# Altium PCB anafun.PcbDoc
Units mm, origin at the board's own origin, x right, y up, seen from the top; angles counter-clockwise.
Board outline 71 x 44 mm, 2 copper layers (Top Layer, Bottom Layer); 60 components, 25 nets, 135 pads, 34 vias.
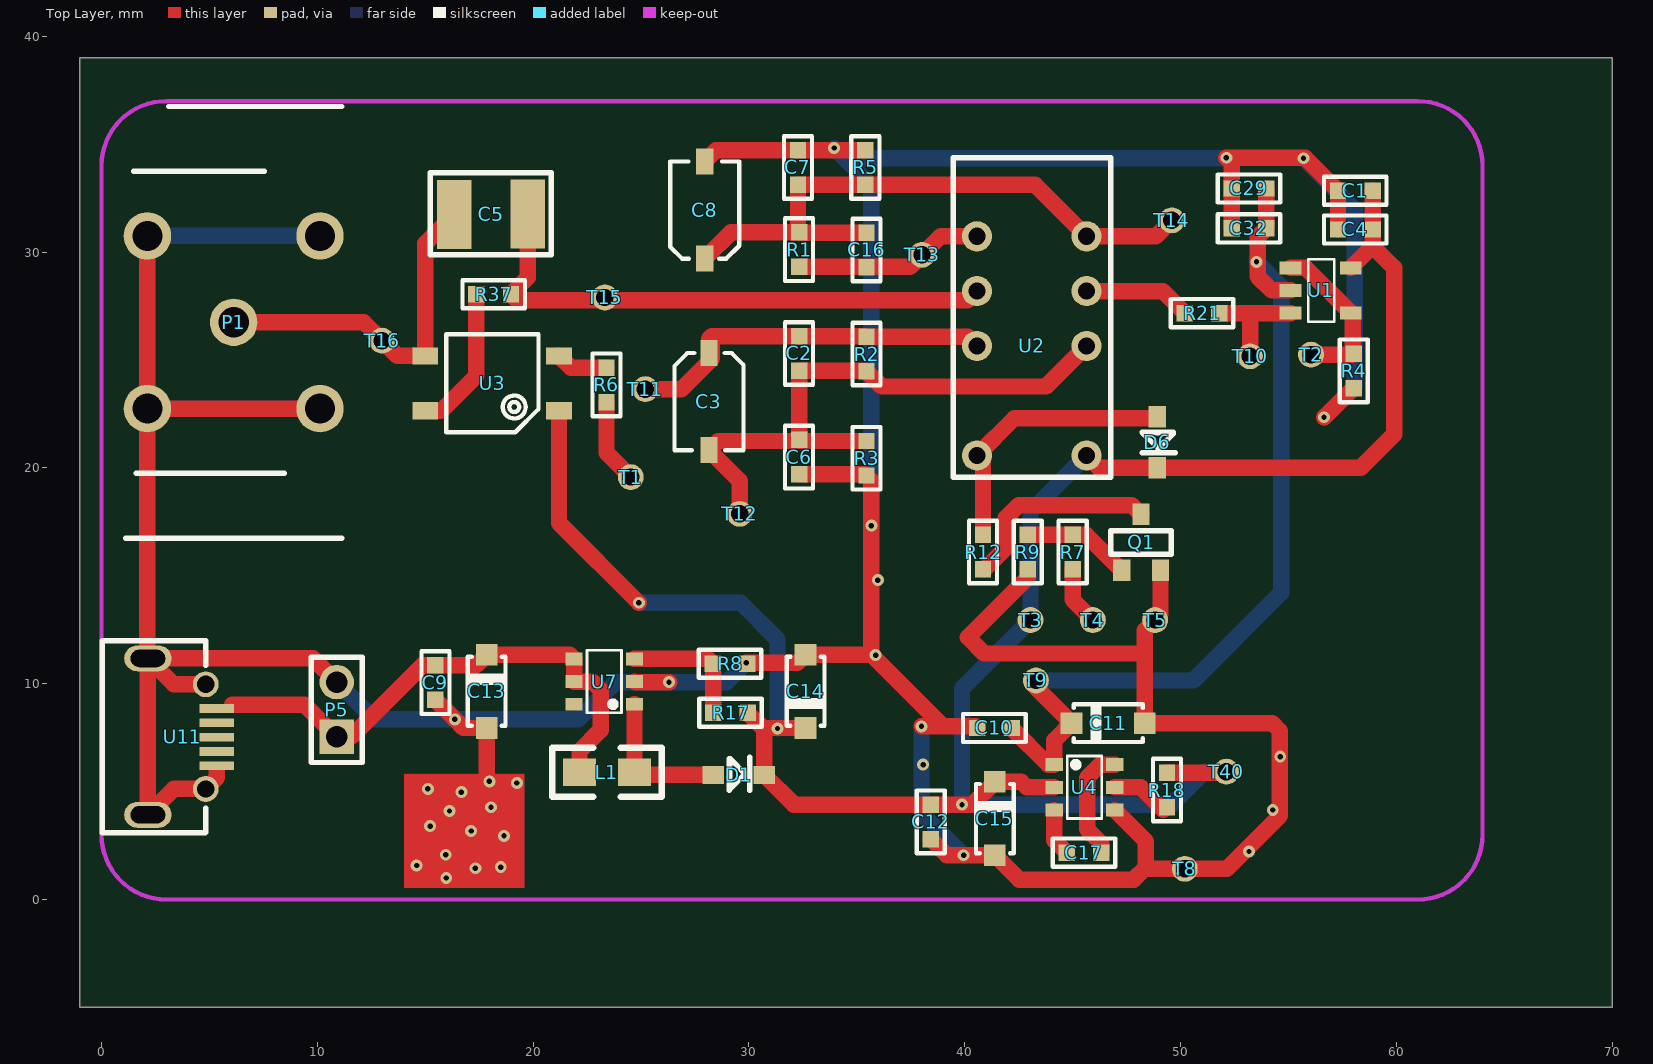
[diagram p0: Top Layer view]
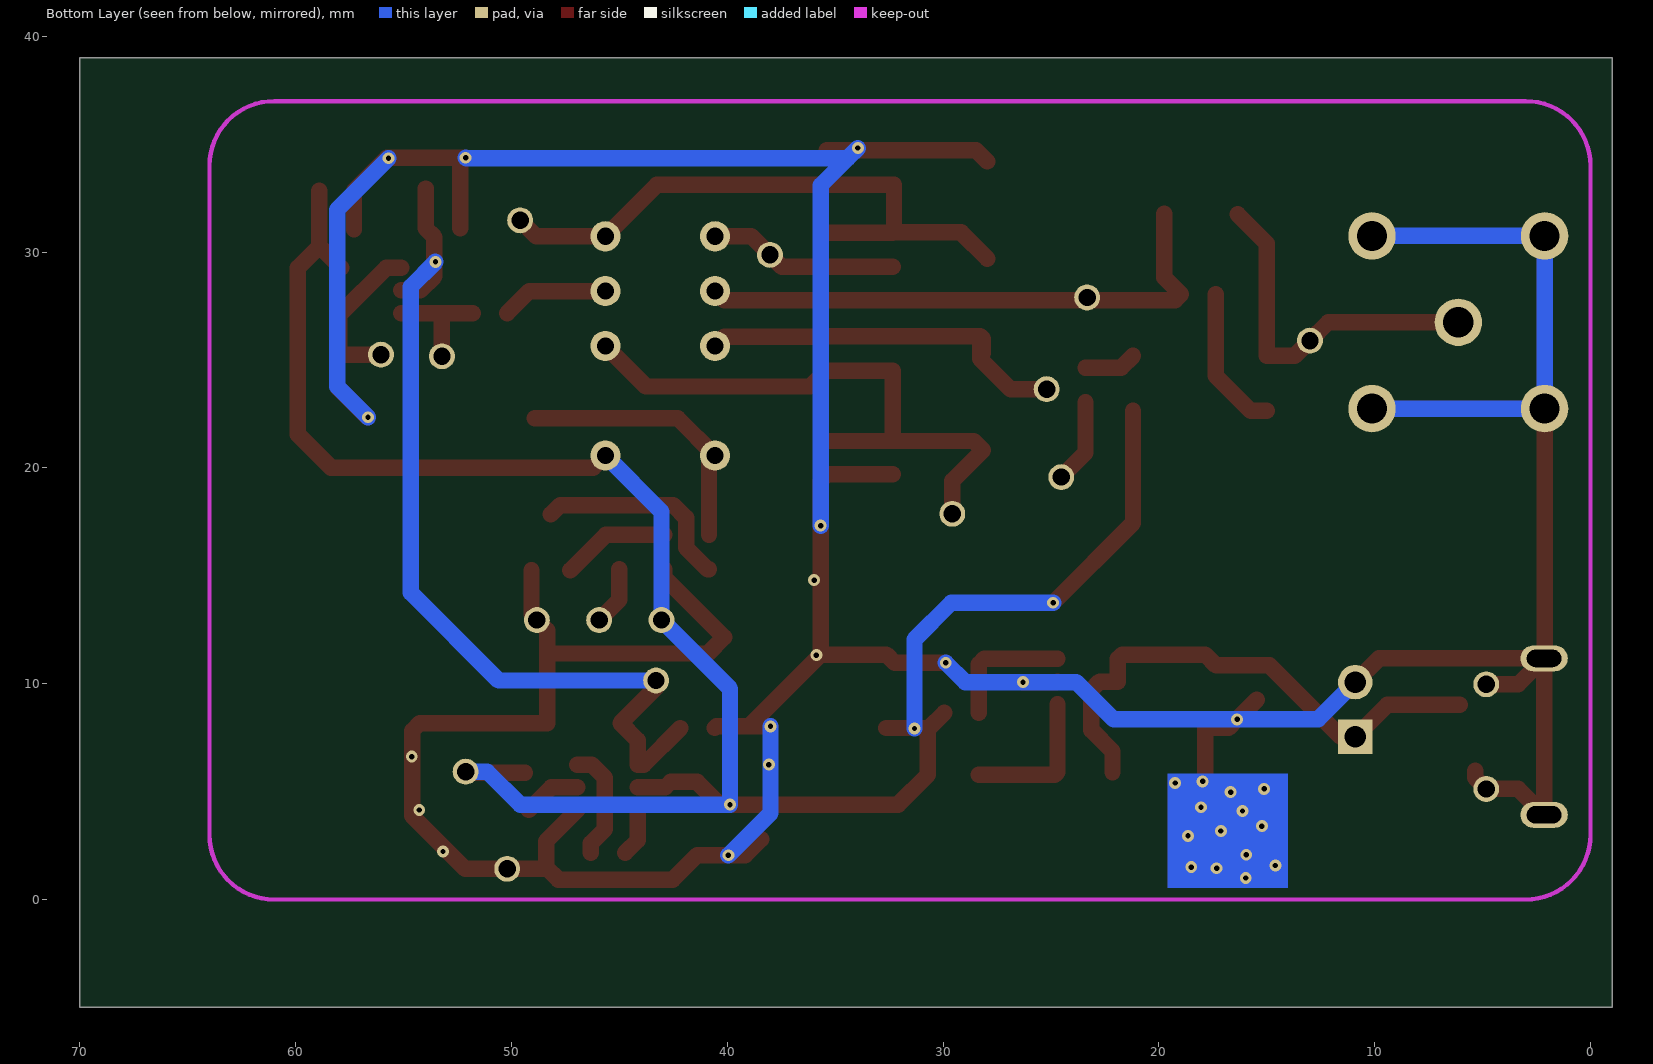
[diagram p1: Bottom Layer view, seen from below]

## Layer stack, top to bottom
Top Layer: signal copper 0.0356
Dielectric: dielectric 0.32, FR-4, Dk 4.8
Bottom Layer: signal copper 0.0356

## Board outline
-1,39 70,39 70,-5 -1,-5

## Design rules (kind name [scope] priority, off if disabled: settings)
Clearance [All] p1: gap=0.127
ComponentClearance [All] p1: gap=0.025 collisioncheckmode=3 verticalgap=0.025 showdistances=FALSE
HoleToHoleClearance [All] p1: gap=0.025 allowstackedmicrovias=TRUE
MinimumSolderMaskSliver [All] p1: minsoldermaskwidth=0.025
PolygonConnect [All] p1: connectstyle=Relief reliefconductorwidth=0.254 reliefentries=4 polygonreliefangle="90 Angle" airgapwidth=0.254
RoutingVias [All] p1: holewidth=0.25 width=0.55 viastyle="Through Hole" minholewidth=0.25 minwidth=0.55 maxholewidth=0.711 maxwidth=2
SilkToSilkClearance [All] p1: silktosilkclearance=0.025
SilkToSolderMaskClearance [IsPad] p1: minsilkscreentomaskgap=0.025 clearancetoexposedcopper=TRUE
SolderMaskExpansion [All] p1: expansion=0.102
Width [All] p1: maxlimit=2.54 minlimit=0.254 preferedwidth=0.254 minimp=50.000000 maximp=50.000000 favimp=50.000000
23 further rules are at their usual default settings.

## Components (designator, comment, footprint, x,y, rotation, side; value= is the part's Value field where it differs from the comment)
C1 "22UF" 0603C 58.9,32.85 r180 top
C2 "15PF" 0603C 32.325,26.108 r270 top
C3 "V_CAP" V-CAP 29.75,20.825 r90 top
C4 "C104" 0603C 58.9,31.05 r180 top
C5 "1UF" 1812 16.35,31.75 r0 top
C6 "360P" 0603C 32.325,21.3 r270 top
C7 "18P" 0603C 32.275,33.125 r90 top
C8 "V_CAP" V-CAP 26.35,34.2 r270 top
C9 "C104" 0603C 15.475,10.85 r270 top
C10 "C104" 0603C 42.175,7.95 r180 top
C11 "47UF" CAP-T-3216 45.05,8.975 r0 top
C12 "C104" 0603C 38.425,4.4 r270 top
C13 "47UF" CAP-T-3216 18.65,11.25 r270 top
C14 "47UF" CAP-T-3216 31.825,8.05 r90 top
C15 "47UF" CAP-T-3216 42.2,5.35 r270 top
C16 "390PF" 0603C 35.45,29.3 r90 top
C17 "3.3UF" 0603C 46.325,2.175 r180 top
C29 "22UF" 0603C 52.375,32.95 r0 top
C32 "C104" 0603C 53.975,31.1 r180 top
D1 "1N5918WS" SOD23-322F 28.35,5.8 r180 top
D6 "BAT54WS" LC-SOD-323F 48.925,22.375 r90 top
L1 "10uH" 0805 22.15,5.9 r0 top
P1 "BNC" BNC-OSC 6.125,26.75 r0 top
P5 "Head2" HEAD2 10.9,10.075 r180 top
Q1 "SI2302" SOT-23-3 47.275,15.25 r0 top
R1 "49.9K" 0603R 32.325,29.317 r90 top
R2 "953K" 0603R 35.45,26.075 r270 top
R3 "47K" 0603R 35.45,21.25 r270 top
R4 "49.9K" 0603R 58.025,25.3 r270 top
R5 "953K" 0603R 35.4,33.125 r90 top
R6 "240R" 0603R 23.4,23.05 r90 top
R7 "R100R" 0603R 45,15.3 r90 top
R8 "100K" 0603R 29.925,10.925 r180 top
R9 "R10K" 0603R 42.925,16.9 r270 top
R12 "R100R" 0603R 40.85,16.9 r270 top
R17 "750K" 0603R 28.35,8.65 r0 top
R18 "R10K" 0603R 49.375,5.875 r270 top
R21 "R100R" 0603R 50.2,27.175 r0 top
R37 "56R" 0603R 18.975,28.05 r180 top
T1 "TP" TEST_POINT 24.525,19.575 r0 top
T2 "TP" TEST_POINT 56.05,25.25 r0 top
T3 "TP" TEST_POINT 43.05,12.95 r0 top
T4 "TP" TEST_POINT 45.938,12.95 r0 top
T5 "TP" TEST_POINT 48.825,12.95 r0 top
T8 "TP" TEST_POINT 50.2,1.425 r0 top
T9 "TP" TEST_POINT 43.3,10.15 r0 top
T10 "TP" TEST_POINT 53.225,25.175 r90 top
T11 "TP" TEST_POINT 25.2,23.65 r0 top
T12 "TP" TEST_POINT 29.575,17.875 r90 top
T13 "TP" TEST_POINT 38.025,29.875 r90 top
T14 "TP" TEST_POINT 49.6,31.475 r90 top
T15 "TP" TEST_POINT 23.325,27.9 r90 top
T16 "TP" TEST_POINT 13,25.9 r90 top
T40 "TP" TEST_POINT 52.125,5.925 r90 top
U1 "AD8605" SOT23-5 55.1,29.275 r270 top
U2 "RELAY-8" RELAY-GS6-8 45.65,20.575 r90 top
U3 "AQY282SX" SOP4 21.2,22.65 r90 top
U4 "SGM3204" SOT23-6 44.15,6.25 r270 top
U7 "SY7152ABC" SOT23-6 24.7,9.05 r90 top
U11 "MINI USB" Micro_USB_t 4.825,9.975 r180 top

## Footprints (in the part's own frame and the unit in brackets; to place one, negate y for a bottom-side part, rotate by r counter-clockwise, add the part's x,y. Pads: shape width x height; smd on the part's side, far side on the other; paste and mask are expansions set on the pad)
0603C [mil]
  rect 30x30 smd: 1(0,0) 2(62.99,0)
  silkscreen extent -26,-26 89,26
0603R [mil]
  rect 30x30 smd: 1(0,0) 2(62.99,0)
  silkscreen extent -26,-26 89,26
0805 [mil]
  rect 60x50 smd: 1(0,0) 2(100,0)
  silkscreen extent -50,-45 150,45
1812 [mm]
  rect 1.6x3.2 smd: 1(0,0) 2(3.4,0.025)
  silkscreen extent -1.12,-1.88 4.5,1.92
BNC-OSC [mm]
  round 2.2 hole 1.4: 1(0,0)
  round 2.2 hole 1.4 unplated: 2(-4,-4) 2(-4,4) 2(4,-4) 2(4,4)
  silkscreen extent -5,-10 5,10
CAP-T-3216 [mm]
  rect 1x1 smd: 1(-0.1,-0.8) 2(3.3,-0.8)
  silkscreen extent 0,-1.68 3.2,0.08
HEAD2 [mm]
  rect 1.6x1.6 hole 1: 1(0,2.54)
  round 1.6 hole 1: 2(0,0)
  silkscreen extent -1.17,-1.15 1.17,3.72
LC-SOD-323F [mm]
  rect 1x0.83 smd: 1(0,0) 2(-2.36,0)
  silkscreen extent -1.68,-0.82 -0.73,0.7, body extent -2.58,-0.7 0.22,0.65, height 0.75
Micro_USB_t [mm]
  round 1.2 hole 0.8: 0(-0.005,4.85) 0(-0.005,0)
  oval 2.2x1.2 hole 0.8 slot 1.6 at 0 deg: 0(2.675,6.05) 0(2.675,-1.2)
  rect 1.6x0.4 smd: 1(-0.525,1.125) 2(-0.525,1.787) 3(-0.525,2.45) 4(-0.525,3.112) 5(-0.525,3.775)
  silkscreen extent 0,-2.02 4.8,6.88
RELAY-GS6-8 [mm]
  round 1.4 hole 0.8: 1(0,0) 2(5.08,0) 3(7.62,0) 4(10.16,0) 5(10.16,5.08) 6(7.62,5.08) 7(5.08,5.08) 8(0,5.08)
  silkscreen extent -1,-1.11 13.8,6.19, body extent -1,-1.11 13.8,6.19, height 10.86
SOD23-322F [mm]
  rect 1x0.83 smd: 1(0,0.025) 2(-2.36,0.025)
  silkscreen extent -1.68,-0.8 -0.73,0.72, body extent -2.58,-0.67 0.22,0.68, height 0.75
SOP4 [mm]
  rect 0.8x1.2 smd: 1(0,0) 2(2.54,0) 3(2.54,6.2) 4(0,6.2)
  silkscreen extent -1,0.95 3.54,5.23
SOT23-5 [mm]
  rect 0.6x1 smd: 1(0,0) 2(1.05,0) 3(2.1,0) 4(2.1,2.8) 5(0,2.8)
  silkscreen extent -0.4,0.82 2.5,2.02
SOT23-6 [mm]
  rect 0.6x0.8 smd: 1(0,0) 2(1.05,0) 3(2.1,0) 4(2.1,2.8) 5(1.05,2.8) 6(0,2.8)
  silkscreen extent -0.4,0.6 2.5,2.2
SOT-23-3 [mm]
  rect 0.8x1 smd: 1(0,0) 2(1.8,0) 3(0.9,2.6)
  silkscreen extent -0.5,0.75 2.3,1.85
TEST_POINT [mm]
  round 1.2 hole 0.8: 1(0,0)
V-CAP [mm]
  rect 1.2x0.8 smd: 1(0,1.6) 2(4.5,1.6)
  silkscreen extent 0,0 4.5,3.2

## Part data
C1 C5 C11 C13 C14 C15 C17 C29: library part C10uF, "贴片电容"
C2 C4 C6 C7 C9 C10 C12 C16 C32: library part C0.1uF, "贴片电容"
C3 C8: library part "Cap Var", "Variable or Adjustable Capacitor"
D1 D6: library part Diode
L1: library part Inductor-100uH
P1: "BNC Elbow Connector"
Q1: library part MOSFET-N
R1 R2 R3 R4 R5 R6 R8 R17 R37: library part R1M

## Via types
v1: diameter 0.55, hole 0.25, Top Layer to Bottom Layer, 34 vias

## Nets (pads, with @x,y where several pads share a name; then routed paths per layer and width w, separated by ;. In a path a pad name is that pad's centre, name@x,y a point inside that pad or via, vN(x,y) a via of type N, cw(c..) or ccw(c..) an arc to the next point about the centre after c; other vN are vias at no path point)
+5: C1.1 C4.1 C12.1 C14.1 C15.1 D1.2 D6.2 R17.2 R18.1 T3.1 T40.1 U1.5 U2.1 U3.1 U4.2 | length 103.8
  Top Layer w0.762: U3.1 21.2,17.45 v1(24.9,13.75) ; R17.2 30.65,7.95 C14.1 ; 30.71,7.89 D1.2 32.085,4.4 C12.1 v1(39.875,4.4) 40.35,4.4 C15.1 42.625,5.45 42.875,5.2 U4.2 ; U2.1 46.21,20.015 D6.2 58.365,20.015 59.9,21.55 59.9,29.275 58.9,30.275 ; R18.1 52.075,5.875 T40.1 ; U1.5 58.9,30.275 ; C1.1 C4.1 58.9,30.275
  Bottom Layer w0.762: v1(24.9,13.75) 29.625,13.75 31.325,12.05 v1(31.325,7.925) ; U2.1 43.05,17.975 T3.1 39.875,9.775 v1(39.875,4.4) 49.6,4.4 51.125,5.925 T40.1
-5: C10.1 C11.1 C29.2 C32.1 T9.1 U1.2 U4.1 | length 42.5
  Top Layer w0.762: C10.1 43.875,6.25 U4.1 44.15,7.375 C11.1 43.3,9.825 T9.1 ; C29.2 C32.1 53.575,30.7 53.575,28.875 54.225,28.225 U1.2
  Bottom Layer w0.762: T9.1 50.6,10.15 54.675,14.225 54.675,28.4 v1(53.525,29.55)
GND: C1.2 C4.2 C6.2 C7.2 C8.1 C9.2 C10.2 C11.2 C12.2 C13.2 C14.2 C15.2 C29.1 C32.2 P1.2 P5.2 Q1.2 R3.2 R4.2 R5.2 R8.1 R9.2 T5.1 T8.1 U4.4 U7.2 U11.0 U11.5 | length 256.9
  Top Layer w0.762: P1.2@2.125,30.75 P1.2@2.125,22.75 ; U11.0@2.15,10.625 2.15,3.925 3.35,5.125 4.83,5.125 5.35,5.645 5.35,5.975 ; U11.0@2.425,10.9 3.35,9.975 U11.0@4.83,9.975 ; P1.2@10.125,22.75 P1.2@2.125,22.75 ; P5.2 9.8,11.175 2.15,11.175 2.125,11.2 P1.2@2.125,22.75 ; C9.2 v1(16.375,8.35) 16.775,7.95 C13.2 17.85,5.025 18.225,4.65 ; U7.2 24.725,10.075 v1(26.3,10.075) ; C8.1 28.475,34.725 C7.2 R5.2 ; v1(29.875,10.975) 32.25,10.975 C14.2 v1@35.675,11.35 ; C6.2 35.4,19.7 R3.2 35.675,19.425 v1(35.675,17.325) v1@35.675,11.35 ; v1(38,8.025) 39,8.025 ; C12.2 39.175,2.05 v1(39.95,2.05) C15.2 42.525,0.925 47.825,0.925 48.4,1.5 ; C10.2 40.5,8.025 39,8.025 ; R9.2 42.925,14.925 40.15,12.15 40.9,11.4 48.35,11.4 ; U4.4 48.4,2.7 48.4,1.5 ; Q1.2 49.075,13.2 T5.1 48.35,12.475 48.35,11.4 ; C32.2 C29.1 52.375,34.125 v1(52.125,34.375) v1@55.7,34.375 ; v1@55.775,34.375 C1.2 C4.2 ; v1(56.65,22.35) 56.675,22.35 R4.2 ; v1@35.675,11.35 39,8.025 ; 48.35,11.4 C11.2 54.25,8.175 54.6,7.825 54.6,3.875 52.15,1.425 T8.1 48.475,1.425 48.4,1.5
  Bottom Layer w0.762: P1.2@10.125,22.75 2.125,22.75 2.125,30.75 P1.2@10.125,30.75 ; P5.2 12.625,8.35 v1(16.375,8.35) 22.1,8.35 23.825,10.075 v1(26.3,10.075) 28.975,10.075 v1(29.875,10.975) ; v1(33.95,34.825) 34.425,34.35 ; v1(35.675,17.325) 35.675,33.1 34.425,34.35 ; v1(38,8.025) 38,4 v1(39.95,2.05) ; v1(52.125,34.375) 52.1,34.35 34.425,34.35 ; v1(55.7,34.35) 58.075,31.975 58.075,23.775 v1(56.65,22.35)
  other v1: 15.975,1 17.325,1.45 18.5,1.5 14.6,1.575 15.95,2.075 53.175,2.225 18.65,2.95 17.125,3.175 15.225,3.4 16.125,4.1 54.275,4.15 18.05,4.275 16.675,4.975 15.125,5.125 19.25,5.4 17.975,5.475 38.075,6.25 54.625,6.625 35.875,11.325 35.975,14.8
NetC2_1: C2.1 C3.2 R2.1 T11.1 U2.7 | length 18
  Top Layer w0.762: T11.1 26.875,23.65 28.275,25.05 28.275,26.108 ; C3.2 28.15,25.983 28.275,26.108 ; R2.1@35.417,26.108 C2.1 28.275,26.108 ; R2.1 40.15,26.075 U2.7
NetC2_2: C2.2 C3.1 C6.1 R2.2 R3.1 T12.1 U2.2 | length 28.7
  Top Layer w0.762: T12.1 29.575,19.4 C3.1 28.575,21.25 C6.1@32.375,21.25 ; R3.1 C6.1@32.375,21.25 ; U2.2 43.77,23.775 36.15,23.775 R2.2 35.417,24.508 C2.2 C6.1 C6.1@32.375,21.25
NetC5_1: C5.1 P1.1 T16.1 U3.3 | length 16.6
  Top Layer w0.762: P1.1 12.15,26.75 T16.1 13.71,25.19 U3.3 15,30.4 C5.1
NetC5_2: C5.2 R37.1 T15.1 U2.6 | length 25.9
  Top Layer w0.762: C5.2 19.75,28.825 R37.1 19.25,27.775 40.15,27.775 U2.6
NetC7_1: C7.1 C8.2 C16.2 R1.2 R5.1 T14.1 U2.4 | length 28.9
  Top Layer w0.762: C8.2 29.167,30.917 R1.2 ; C16.2 32.342,30.9 R1.2 ; T14.1 48.86,30.735 U2.4 43.26,33.125 R5.1 C7.1 32.275,30.967 R1.2
NetC16_1: C16.1 R1.1 T13.1 U2.5 | length 8.8
  Top Layer w0.762: R1.1 37.467,29.317 T13.1 38.885,30.735 U2.5
NetC17_1: C17.1 U4.6 | length 5.3
  Top Layer w0.762: C17.1 46.325,2.6 45.675,3.25 45.675,5.65 46.275,6.25 U4.6
NetC17_2: C17.2 U4.3 | length 2.2
  Top Layer w0.762: U4.3 44.15,2.75 C17.2
NetD1_1: D1.1 L1.2 U7.1 | length 6.8
  Top Layer w0.762: U7.1 24.7,5.91 24.835,5.775 D1.1
NetQ1_1: Q1.1 R7.2 R9.1 | length 5
  Top Layer w0.762: R9.1 45.625,16.9 Q1.1
NetQ1_3: Q1.3 R12.2 | length 9.5
  Top Layer w0.762: R12.2 40.91,15.3 41.909,16.299 41.909,17.685 42.499,18.275 47.75,18.275 Q1.3
NetR4_1: R4.1 T2.1 U1.1 U1.4 | length 7.6
  Top Layer w0.762: U1.1 55.8,29.275 U1.4 57.975,27.1 57.975,25.25 T2.1
NetR6_1: R6.1 T1.1 | length 3.9
  Top Layer w0.762: R6.1 23.4,20.7 T1.1
NetR6_2: R6.2 U3.2 | length 2.4
  Top Layer w0.762: U3.2 21.74,24.65 R6.2
NetR7_1: R7.1 T4.1 | length 2.7
  Top Layer w0.762: R7.1 45,13.887 T4.1
NetR8_2: R8.2 R17.1 U7.3 | length 6
  Top Layer w0.762: U7.3 28.1,11.15 R8.2 28.35,10.9 R17.1
NetR18_2: R18.2 U4.5 | length 2.7
  Top Layer w0.762: U4.5 48.15,5.2 R18.2@49.2,4.15
NetR21_1: R21.1 U2.3 | length 5
  Top Layer w0.762: U2.3 49.18,28.195 R21.1
NetR21_2: R21.2 T10.1 U1.3 | length 5.3
  Top Layer w0.762: R21.2 53.225,27.175 ; T10.1 53.225,27.175 ; U1.3 53.225,27.175
NetR37_2: R37.2 U3.4 | length 6.8
  Top Layer w0.762: U3.4 15.75,22.65 17.375,24.275 R37.2
RE1: D6.1 R12.1 U2.8 | length 12.9
  Top Layer w0.762: R12.1 40.85,20.295 U2.8 42.295,22.3 D6.1@48.925,22.3
VIN: C9.1 C13.1 L1.1 P5.1 U7.4 U7.5 U11.1 | length 24.8
  Top Layer w0.762: U11.1@6.05,9.025 9.41,9.025 P5.1 11.56,7.535 14.875,10.85 C9.1 17.35,10.85 C13.1 21.7,11.35 U7.4 U7.5 22.75,10.1 23.125,9.725 23.125,7.85 22.15,6.875 L1.1
pads on no net: U7.6 U11.2 U11.3 U11.4

## Keep-outs
Keep-Out Layer:
  lines w0.2: 0,3 ccw(c3,3) 3,0 61,0 ccw(c61,3) 64,3 64,34 ccw(c61,34) 61,37 3,37 ccw(c3,34) 0,34 0,3

## Other copper
Top Layer:
  rectangle net GND: 14.025,0.525 19.6,5.825
Bottom Layer:
  rectangle net GND: 14.025,0.525 19.6,5.85

## Silkscreen, mask and mechanical layers (free items; w line width, h text height)
Top Solder:
  rectangle: 13.85,0.175 19.925,6.025
Bottom Solder:
  rectangle: 13.85,0.175 19.925,6